# Allegro board Delta Robot PCB.brd
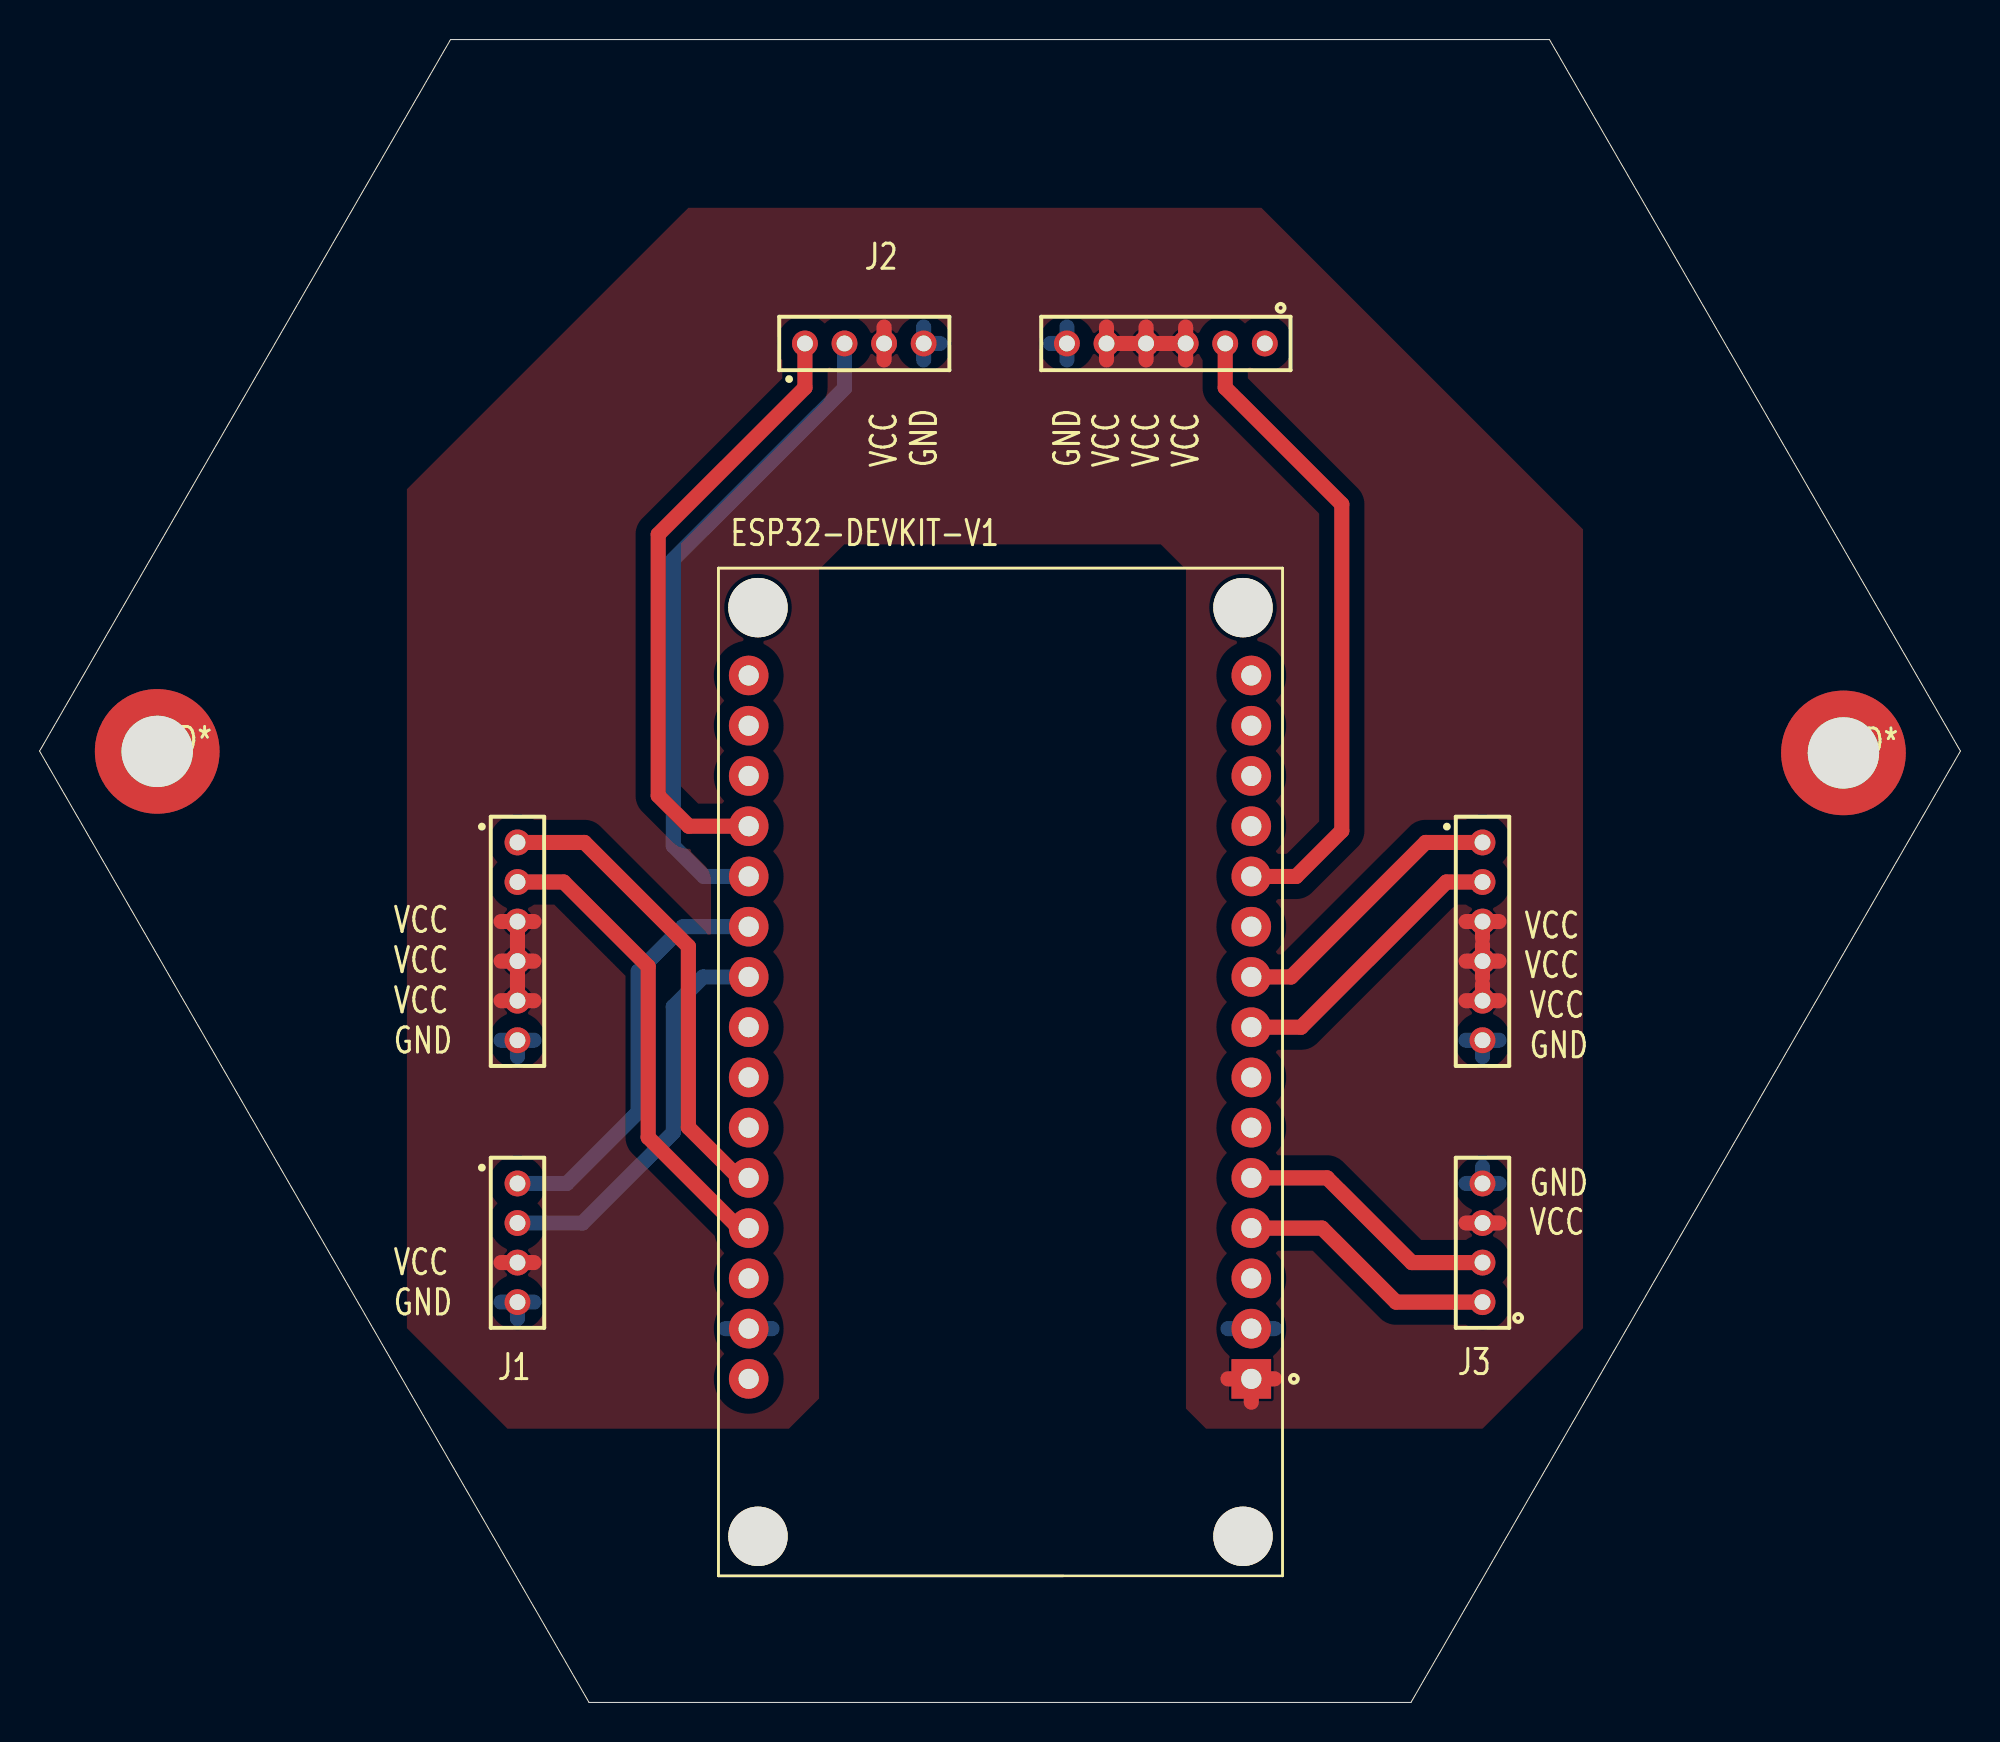
[diagram p0: board, top side]
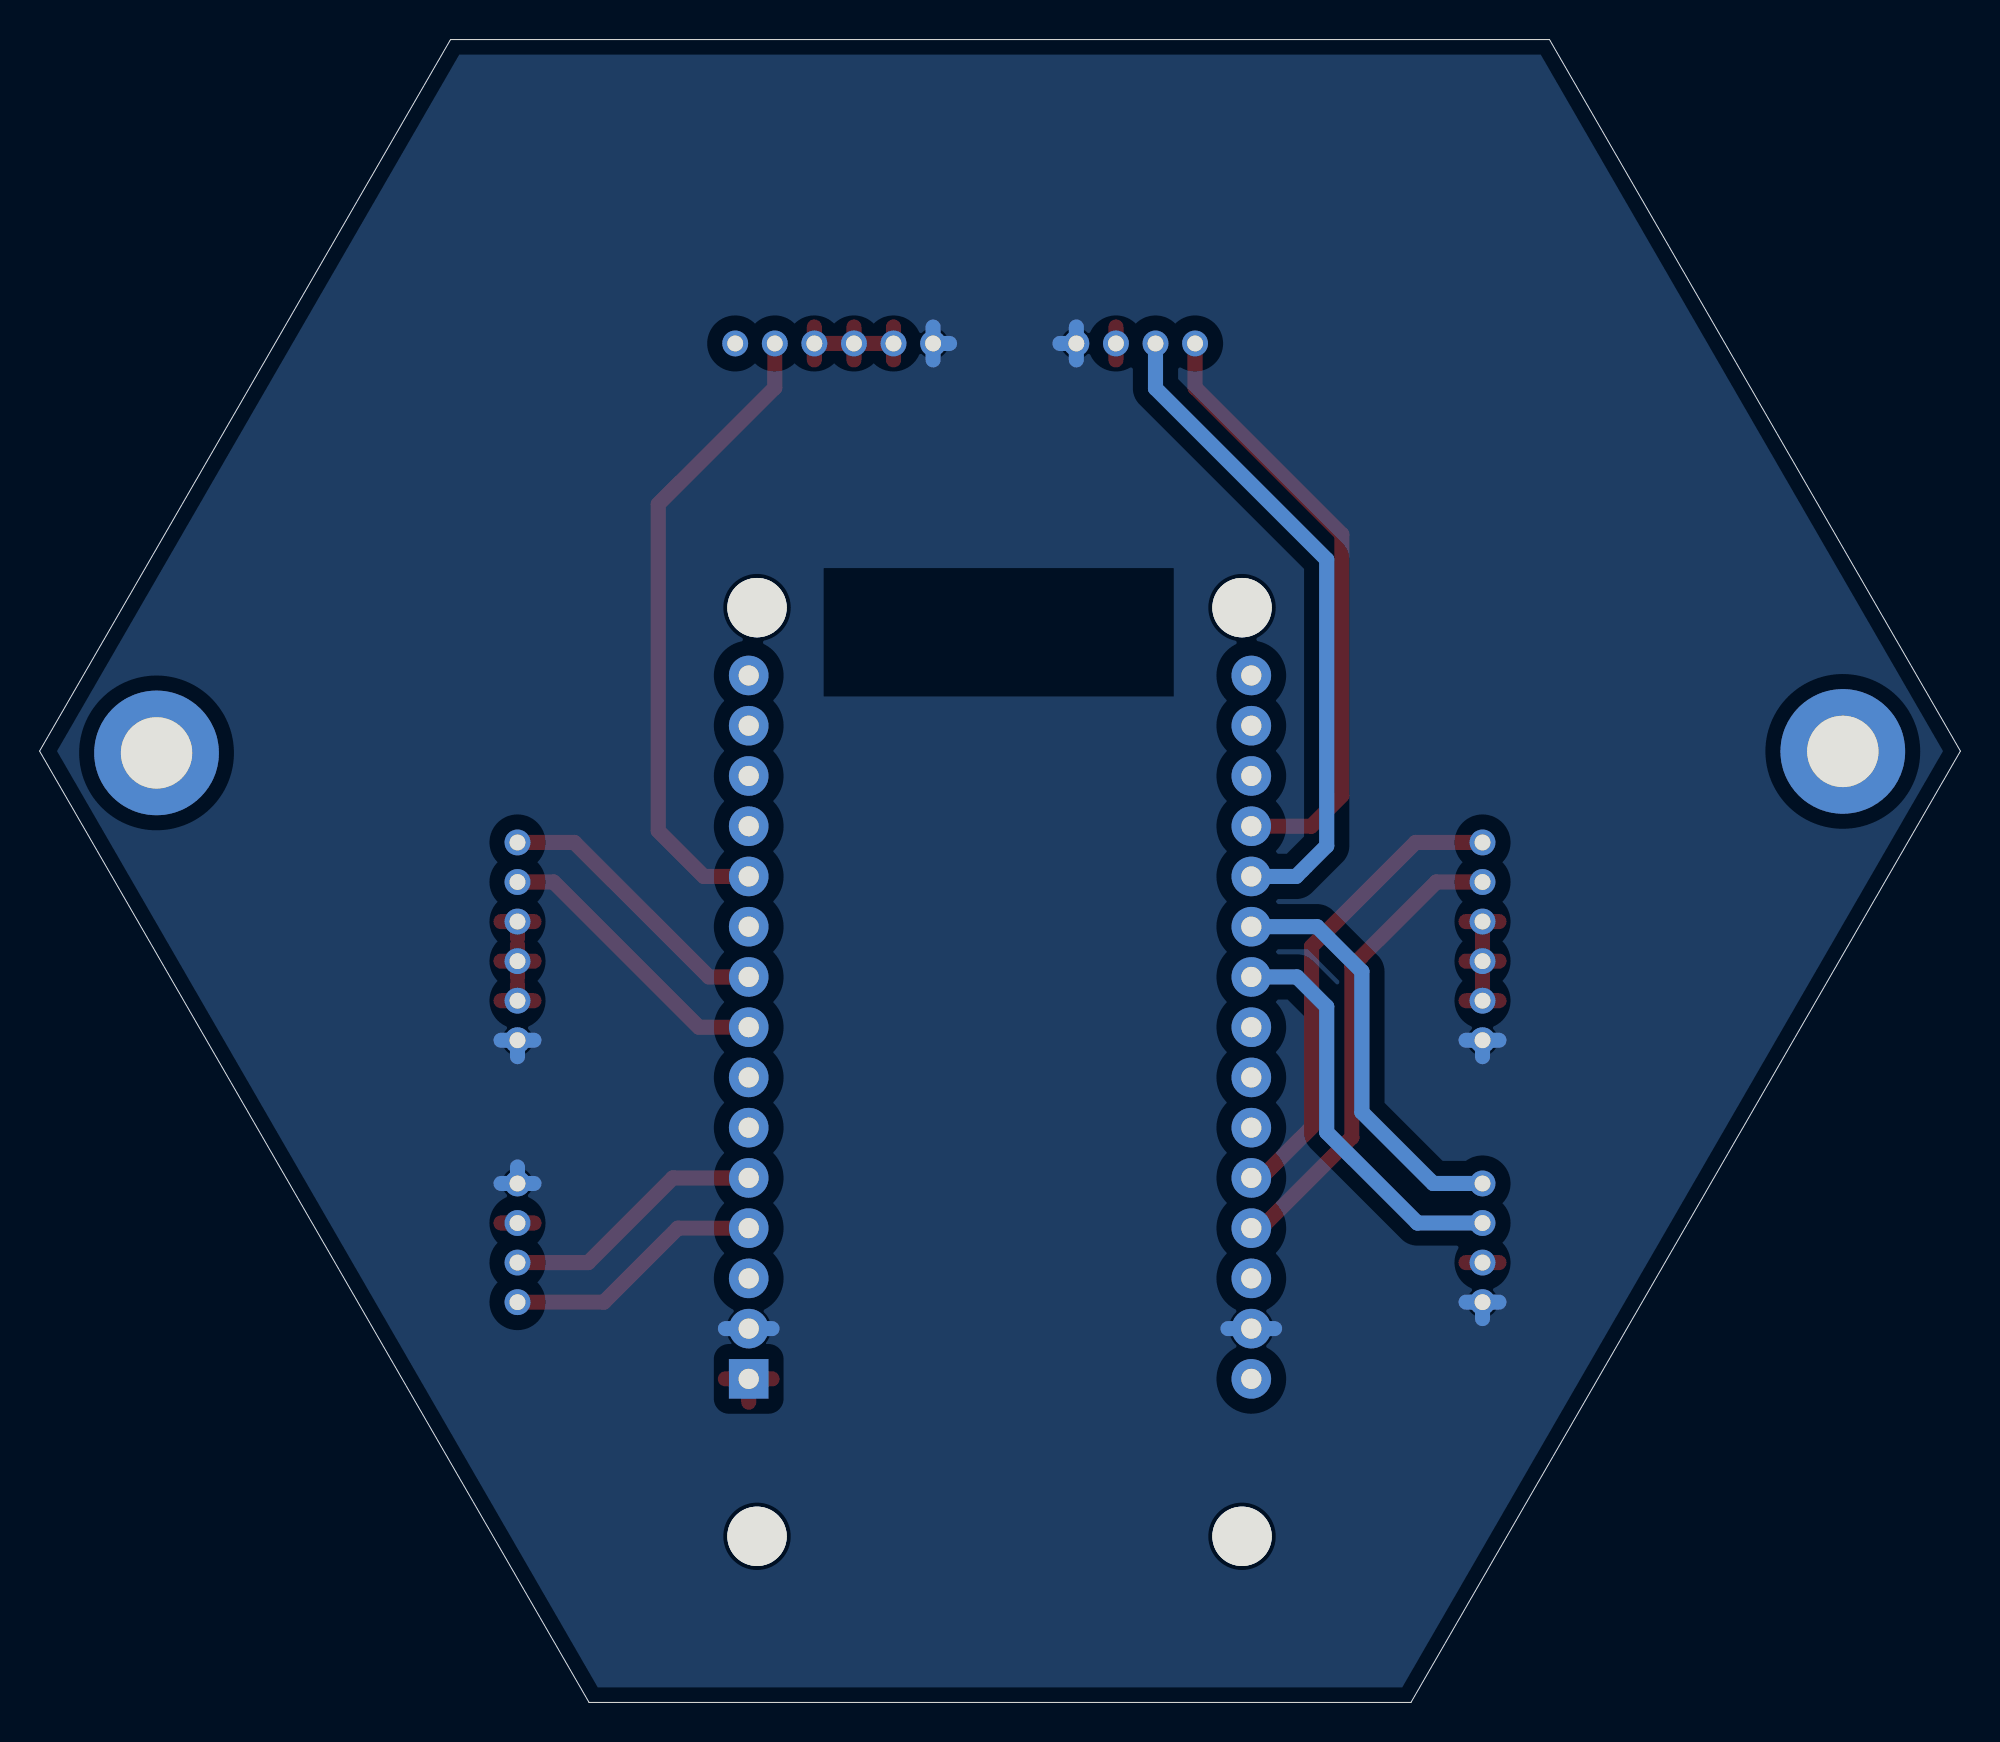
[diagram p1: board, bottom side, seen from below]

Outline 97.07 x 84.07 mm; copper layers: TOP, BOTTOM. Coordinates in mm from the lower left corner of the outline.
Outline path: 0,48.1 20.77,84.07 76.3,84.07 97.07,48.1 69.3,0 27.77,0 0,48.1

## Design rules (mm)
constraint set DEFAULT: min track width 0.762

## Placement (name value [footprint] x y rotation side)
J1  4ST  [62000411821]  24.15 23.24 270 top
J2  4ST  [62000411821]  41.68 68.7 0 top
J3  4ST  [62000411821]  72.92 23.24 90 top
J4  6ST  [62000611821]  72.92 38.48 270 top
J5  6ST  [62000611821]  56.92 68.7 180 top
J6  6ST  [62000611821]  24.15 38.48 270 top
RD*  -  [unnamed]  5.94 48.08 0 top
RD*#2  -  [unnamed]  91.16 48 0 top
U1  ESP32-DEVKIT-V1  [MODULE_ESP32_DEVKIT_V1]  48.54 31.87 180 top

## Library data of the parts
J1-J3 = 4ST
J4-J6 = 6ST
U1 = ESP32-DEVKIT-V1

## Footprints (pads in the part's own frame, mm; a bottom-side part is the same pattern mirrored in y, then rotated)
62000411821
  round 1.308 hole 0.8: 1(-3,0) 2(-1,0) 3(1,0) 4(3,0)
62000611821
  round 1.308 hole 0.8: 1(-5,0) 2(-3,0) 3(-1,0) 4(1,0) 5(3,0) 6(5,0)
MODULE_ESP32_DEVKIT_V1
  round 3 hole 3 unplated: (-12.28,23.475) (-12.28,-23.475) (12.23,23.475) (12.23,-23.475)
  rect 2x2 hole 1.02: 1(-12.7,15.515)
  round 2 hole 1.02: 2(-12.7,12.975) 3(-12.7,10.435) 4(-12.7,7.895) 5(-12.7,5.355) 6(-12.7,2.815) 7(-12.7,0.275) 8(-12.7,-2.265) 9(-12.7,-4.805) 10(-12.7,-7.345) 11(-12.7,-9.885) 12(-12.7,-12.425) 13(-12.7,-14.965) 14(-12.7,-17.505) 15(-12.7,-20.045) 16(12.7,-20.045) 17(12.7,-17.505) 18(12.7,-14.965) 19(12.7,-12.425) 20(12.7,-9.885) 21(12.7,-7.345) 22(12.7,-4.805) 23(12.7,-2.265) 24(12.7,0.275) 25(12.7,2.815) 26(12.7,5.355) 27(12.7,7.895) 28(12.7,10.435) 29(12.7,12.975) 30(12.7,15.515)
unnamed
  round 6.299 hole 3.607: (0,0)

## Nets
GND: J1.4 J2.4 J3.4 J4.6 J5.6 J6.6 U1.2 U1.29
VCC: J1.3 J2.3 J3.3 J4.3 J4.4 J4.5 J5.3 J5.4 J5.5 J6.3 J6.4 J6.5 U1.1
2: J3.1 U1.4
4: J3.2 U1.5
12: J6.2 U1.27
14: J6.1 U1.26
15: J4.2 U1.8
18: J4.1 U1.9
19: J5.1
21: J5.2 U1.11
32: J1.1 U1.21
33: J1.2 U1.22
34: J2.1 U1.19
35: J2.2 U1.20
`9: U1.10

Pads without a net: U1 3 6 7 12 13 14 15 16 17 18 23 24 25 28 30

## Routing (per net, layer and track width the routed paths; a pad name or vN(x,y) marks a point on that pad's centre or on a via; arc(x,y) is an arc through that point)
GND: length 19.7
  BOTTOM w0.762: J1.4 24.98,20.24 ; J1.4 23.32,20.24 ; J1.4 24.15,19.41 ; 51.09,68.7 J5.6 ; J5.6 51.92,69.54 ; J5.6 51.92,67.87 ; J6.6 24.98,33.48 ; J6.6 23.32,33.48 ; J6.6 24.15,32.65 ; J3.4 73.75,26.24 ; J3.4 72.92,27.07 ; J3.4 72.09,26.24 ; 34.66,18.9 U1.29 37.01,18.9 ; 62.41,18.9 U1.2 60.06,18.9 ; J4.6 73.75,33.48 ; J4.6 72.92,32.65 ; J4.6 72.09,33.48 ; J2.4 45.51,68.7 ; J2.4 44.68,69.54 ; J2.4 44.68,67.87
VCC: length 34.8
  TOP w0.762: 61.24,15.18 U1.1 ; U1.1 62.41,16.36 ; U1.1 60.06,16.36 ; 72.92,38.64 J4.3 ; J4.3 72.09,39.48 ; J4.3 73.75,39.48 ; J6.4 24.98,37.48 ; J6.4 23.32,37.48 ; J6.4 J6.3 ; J6.4 J6.5 ; J5.5 J5.4 ; J5.5 53.92,67.87 ; J5.5 53.92,69.54 ; J5.4 J5.3 ; J5.4 55.92,69.54 ; J5.4 55.92,67.87 ; 72.09,35.48 J4.5 ; J4.5 73.75,35.48 ; J4.5 72.92,36.31 ; J6.3 23.32,39.48 ; J6.3 24.98,39.48 ; 73.75,24.24 J3.3 72.09,24.24 ; 57.92,67.87 J5.3 ; J5.3 57.92,69.54 ; 42.68,69.54 J2.3 42.68,67.87 ; 23.32,35.48 J6.5 ; J6.5 24.98,35.48 ; J4.4 72.92,38.31 ; J4.4 72.92,36.64 ; J4.4 73.75,37.48 ; J4.4 72.09,37.48 ; 23.32,22.24 J1.3 24.98,22.24
2: length 13.2
  TOP w0.762: U1.4 64.81,23.98 68.55,20.24 J3.1
4: length 13.5
  TOP w0.762: J3.2 69.35,22.24 65.07,26.52 U1.5
12: length 24
  TOP w0.762: J6.2 26.49,41.48 30.76,37.21 30.76,28.57 35.34,23.98 U1.27
14: length 24.1
  TOP w0.762: J6.1 27.53,43.48 32.79,38.22 32.79,29.08 35.34,26.52 U1.26
15: length 14.7
  TOP w0.762: J4.2 71.09,41.48 63.75,34.14 U1.8
18: length 14.5
  TOP w0.762: U1.9 63.25,36.68 70.05,43.48 J4.1
21: length 32.6
  TOP w0.762: J5.2 59.92,66.47 65.81,60.58 65.81,44.06 63.5,41.76 U1.11
32: length 21.2
  BOTTOM w0.762: J1.1 26.64,26.24 30.25,29.84 30.25,36.95 32.51,39.22 U1.21
33: length 20.6
  BOTTOM w0.762: U1.22 33.53,36.68 32.03,35.18 32.03,28.83 27.44,24.24 J1.2
34: length 31.1
  TOP w0.762: J2.1 38.68,66.47 31.26,59.05 31.26,45.84 32.81,44.3 U1.19
35: length 33.4
  BOTTOM w0.762: U1.20 33.57,41.76 32.03,43.3 32.03,57.78 40.68,66.43 J2.2

## Copper pours and planes (outline as drawn; the poured copper is in the pictures)
GND on BOTTOM: 28.21,0.76 0.88,48.1 21.21,83.3 75.86,83.3 96.19,48.1 68.86,0.76
VCC on TOP: 23.64,13.84 37.87,13.84 39.39,15.36 39.39,57.27 40.66,58.54 56.66,58.54 57.93,57.27 57.93,14.86 58.95,13.84 72.92,13.84 78,18.92 78,59.31 61.74,75.56 32.79,75.56 18.56,61.34 18.56,18.92 ; 2 cut-outs

## Text on the board
Ref Des/Silkscreen Top: VCC | GND
NCLEGEND-1-2: FIGURE | FINISHED_SIZE | 31.5 | 40.16 | 142.0 | 118.11 | DRILL CHART: TOP to BOTTOM | ALL UNITS ARE IN MILS | TOLERANCE_DRILL | +0.0/-0.0 | +3.0/-3.0 | PLATED | NON-PLATED | QTY | 30 | 1 | 29 | 2 | 4
